# Altium PCB SOIC16.PcbDoc
Units mil, origin at the board's own origin, x right, y up, seen from the top; angles counter-clockwise.
Board outline 800 x 800 mil, 2 copper layers (Top Layer, Bottom Layer); 3 components, 16 nets, 32 pads, 0 vias.
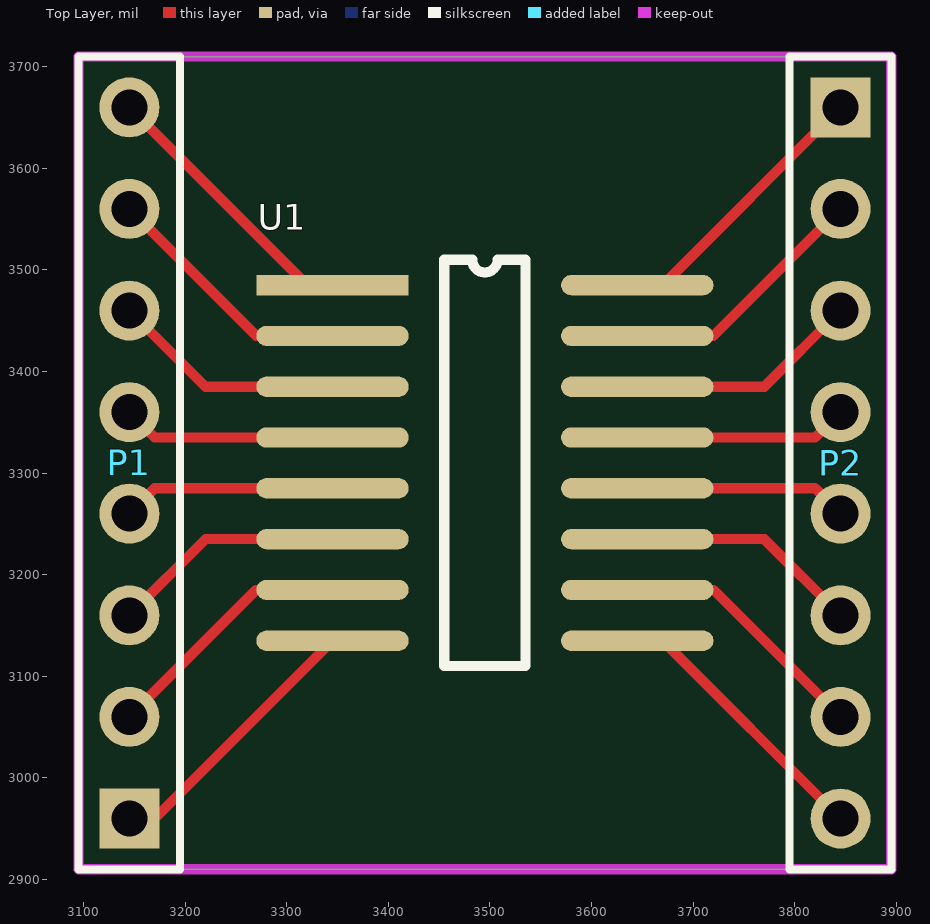
[diagram p0: Top Layer view]
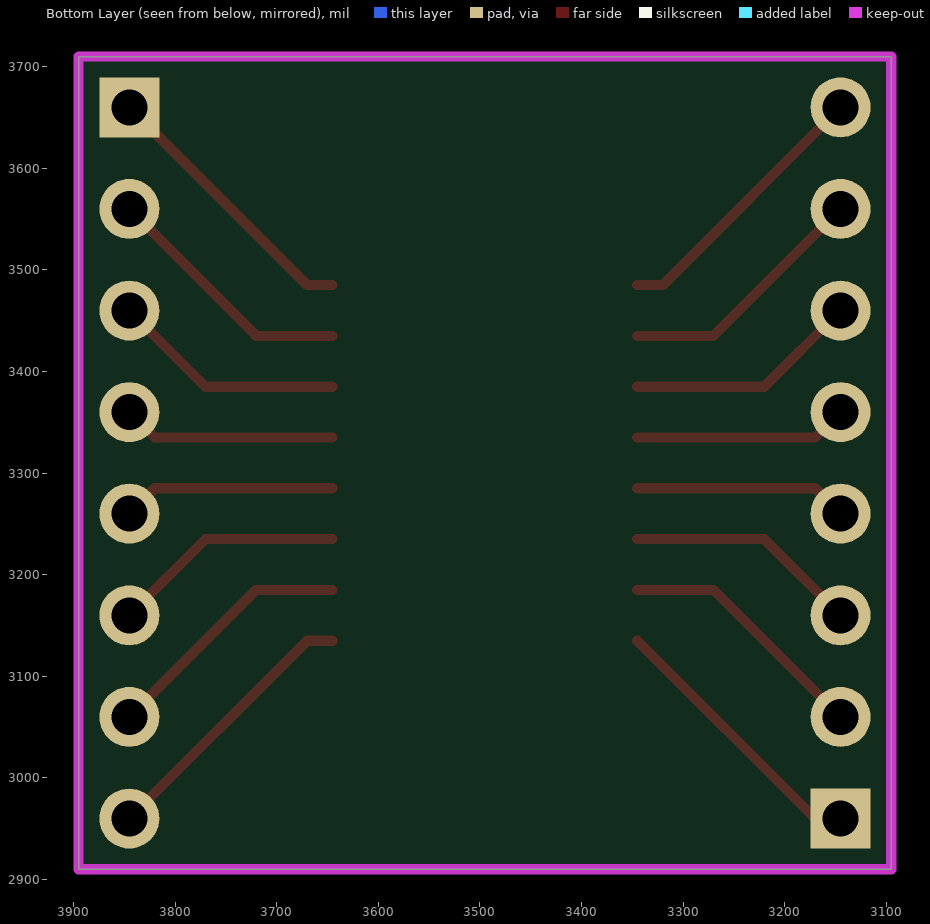
[diagram p1: Bottom Layer view, seen from below]

## Layer stack, top to bottom
Top Solder: solder mask 0.4, Solder Resist, Dk 3.5
Top Layer: signal copper 1.4
Dielectric 1: dielectric 12.6, FR-4, Dk 4.8
Bottom Layer: signal copper 1.4
Bottom Solder: solder mask 0.4, Solder Resist, Dk 3.5

## Board outline
3095,2910 3895,2910 3895,3710 3095,3710

## Design rules (kind name [scope] priority, off if disabled: settings)
Clearance [All] p1: gap=10 ignorepadtopadclearanceinfootprint=FALSE except(0: Arc-Hole Track-Hole SMDPad-Hole THPad-Hole Via-Hole Fill-Hole Poly-Hole Region-Hole Text-Hole)
PolygonConnect [All] p1: connectstyle=Relief reliefconductorwidth=10 reliefentries=4 polygonreliefangle="90 Angle" airgapwidth=10
RoutingVias [All] p1: holewidth=28 width=50 viastyle="Through Hole" minholewidth=28 minwidth=50 maxholewidth=28 maxwidth=50
SolderMaskExpansion [All] p1: expansion=4
Width [All] p1: maxlimit=10 minlimit=10 preferedwidth=10
30 further rules are at their usual default settings.

## Components (designator, comment, footprint, x,y, rotation, side; value= is the part's Value field where it differs from the comment)
P1 "Header 8" HDR1X8 3145,2960 r90 top
P2 "Header 8" HDR1X8 3845,3660 r270 top
U1 "SOIC_16" SOIC16 3345,3485 r0 top

## Footprints (in the part's own frame and the unit in brackets; to place one, negate y for a bottom-side part, rotate by r counter-clockwise, add the part's x,y. Pads: shape width x height; smd on the part's side, far side on the other; paste and mask are expansions set on the pad)
HDR1X8 [mm] "Connector; Header; 8 Position"
  rect 1.5x1.5 hole 0.9: 1(0,0)
  round 1.5 hole 0.9: 2(2.54,0) 3(5.08,0) 4(7.62,0) 5(10.16,0) 6(12.7,0) 7(15.24,0) 8(17.78,0)
  silkscreen extent -1.27,-1.27 19.05,1.27
SOIC16 [mil]
  rect 150x20 smd: 1(0,0)
  oval 150x20 smd: 2(0,-50) 3(0,-100) 4(0,-150) 5(0,-200) 6(0,-250) 7(0,-300) 8(0,-350) 9(300,-350) 10(300,-300) 11(300,-250) 12(300,-200) 13(300,-150) 14(300,-100) 15(300,-50) 16(300,0)
  silkscreen extent 110,-375 190,25

## Part data
P1 P2: "Header, 8-Pin", LatestRevisionDate=17-Jul-2002, LatestRevisionNote="Re-released for DXP Platform.", Publisher="Altium Limited"

## Nets (pads, with @x,y where several pads share a name; then routed paths per layer and width w, separated by ;. In a path a pad name is that pad's centre, name@x,y a point inside that pad or via, vN(x,y) a via of type N, cw(c..) or ccw(c..) an arc to the next point about the centre after c; other vN are vias at no path point)
NetP1_1: P1.1 U1.8 | length 272.5
  Top Layer w10: P1.1 3170,2960 U1.8
NetP1_2: P1.2 U1.7 | length 251.8
  Top Layer w10: P1.2 3270,3185 U1.7
NetP1_3: P1.3 U1.6 | length 231.1
  Top Layer w10: P1.3 3220,3235 U1.6
NetP1_4: P1.4 U1.5 | length 210.4
  Top Layer w10: P1.4 3170,3285 U1.5
NetP1_5: P1.5 U1.4 | length 210.4
  Top Layer w10: P1.5 3170,3335 U1.4
NetP1_6: P1.6 U1.3 | length 231.1
  Top Layer w10: P1.6 3220,3385 U1.3
NetP1_7: P1.7 U1.2 | length 251.8
  Top Layer w10: P1.7 3270,3435 U1.2
NetP1_8: P1.8 U1.1 | length 272.5
  Top Layer w10: P1.8 3320,3485 U1.1
NetP2_1: P2.1 U1.16 | length 272.5
  Top Layer w10: U1.16 3670,3485 P2.1
NetP2_2: P2.2 U1.15 | length 251.8
  Top Layer w10: U1.15 3720,3435 P2.2
NetP2_3: P2.3 U1.14 | length 231.1
  Top Layer w10: U1.14 3770,3385 P2.3
NetP2_4: P2.4 U1.13 | length 210.4
  Top Layer w10: U1.13 3820,3335 P2.4
NetP2_5: P2.5 U1.12 | length 210.4
  Top Layer w10: U1.12 3820,3285 P2.5
NetP2_6: P2.6 U1.11 | length 231.1
  Top Layer w10: U1.11 3770,3235 P2.6
NetP2_7: P2.7 U1.10 | length 251.8
  Top Layer w10: U1.10 3720,3185 P2.7
NetP2_8: P2.8 U1.9 | length 272.5
  Top Layer w10: U1.9 3670,3135 P2.8

## Keep-outs
Keep-Out Layer:
  the board outline again, w10